# EAGLE board sniffernano2.0 (EAGLE 5.06)
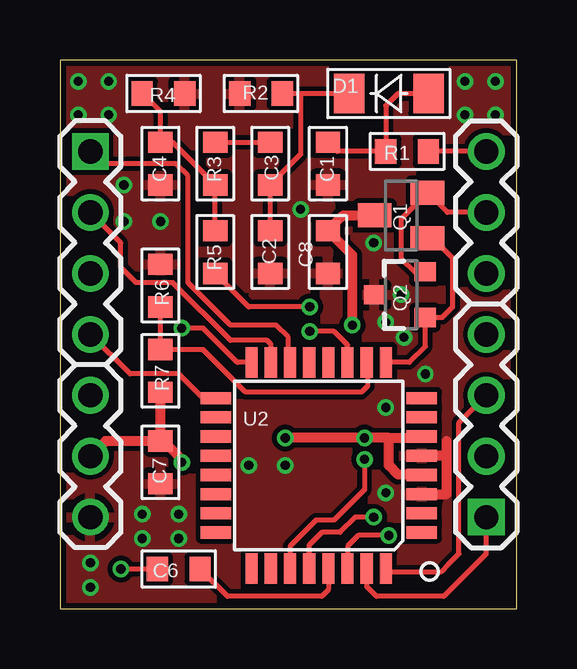
[diagram p0: board, top side]
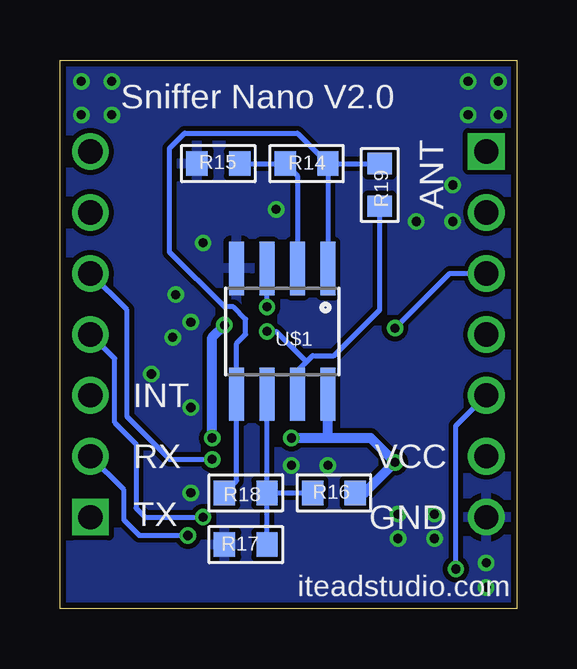
[diagram p1: board, bottom side, seen from below]

Size 19.05 x 22.86 mm. Coordinates in mm from the lower left corner, seen from the top.
Outline: 0,0 19.05,0 19.05,22.86 0,22.86 0,0
Copper layers (1*16): Top 0.035mm / dielectric 1.5mm / Bottom 0.035mm
Design rules "SeeedStudio_rule_no_angle_090911": minimum track width 6mil, minimum drill 12mil, track to track 6mil, track to pad 6mil, pad to pad 6mil, via to via 6mil, smd to smd 0mil, copper to edge 10mil, drill to drill 10mil, minimum pad ring 10mil, minimum via ring 6mil, stop-mask expansion 2mil, vias tented up to drill 100mil, thermal gap 10mil
Net classes: 0 default: width 0.003 mm, drill 0.254 mm, clearance 0.152 mm

## Footprints (pad centres in the part's own frame; a part is rotated, then mirrored left to right if it is on the bottom)
0603 = smd 0.889 x 1.016: 1 -0.889,0; 2 0.889,0
DIODE1206 = smd 1.27 x 1.651: + -1.651,0; - 1.651,0
1X04 = drill 1.016 square: 1 0,0 | drill 1.016 round: 2 2.54,0; 3 5.08,0; 4 7.62,0
1X03 = drill 1.016 round: 1 0,0; 2 2.54,0; 3 5.08,0
SOT23 = smd 1 x 1.4: 1 -0.95,-1.1; 2 0.95,-1.1; 3 0,1.1
SOT23-3 = smd 0.8 x 0.9: 1 -0.95,-1; 2 0.95,-1; 3 0,1.1
ATMEGA168-20AU = smd 1.27 x 0.508: 1 -4.293,2.8; 2 -4.293,2; 3 -4.293,1.2; 4 -4.293,0.4; 5 -4.293,-0.4; 6 -4.293,-1.2; 7 -4.293,-2; 8 -4.293,-2.8; 17 4.293,-2.8; 18 4.293,-2; 19 4.293,-1.2; 20 4.293,-0.4; 21 4.293,0.4; 22 4.293,1.2; 23 4.293,2; 24 4.293,2.8 | smd 0.508 x 1.27: 9 -2.8,-4.293; 10 -2,-4.293; 11 -1.2,-4.293; 12 -0.4,-4.293; 13 0.4,-4.293; 14 1.2,-4.293; 15 2,-4.293; 16 2.8,-4.293; 25 2.8,4.293; 26 2,4.293; 27 1.2,4.293; 28 0.4,4.293; 29 -0.4,4.293; 30 -1.2,4.293; 31 -2,4.293; 32 -2.8,4.293
SO08 = smd 0.61 x 2.21: 1 -1.905,-2.616; 2 -0.635,-2.616; 3 0.635,-2.616; 4 1.905,-2.616; 5 1.905,2.616; 6 0.635,2.616; 7 -0.635,2.616; 8 -1.905,2.616

## Placement (x,y rotation side)
C1  3.3n  [0603]  11.18,18.54 90 top
C2  102  [0603]  8.76,14.86 90 top
C3  10u  [0603]  8.76,18.54 270 top
C4  102  [0603]  4.19,18.54 90 top
C6  100n  [0603]  4.95,1.65 180 top
C7  100n  [0603]  4.19,6.1 90 top
C8  100n  [0603]  11.18,14.86 90 top
D1  4818  [DIODE1206]  13.72,21.46 180 top
JP1  [1X04]  1.27,19.05 270 top
JP2  [1X03]  1.27,8.89 270 top
JP3  [1X03]  17.78,13.97 90 top
JP4  [1X04]  17.78,3.81 90 top
Q1  S8050  [SOT23]  14.22,16.38 90 top
Q2  S8550  [SOT23-3]  14.22,13.08 90 top
R1  10R  [0603]  14.48,19.05 180 top
R2  100k  [0603]  8.38,21.46 0 top
R3  10k  [0603]  6.48,18.54 90 top
R4  100k  [0603]  4.32,21.46 180 top
R5  10k  [0603]  6.48,14.86 90 top
R6  15k  [0603]  4.19,13.46 270 top
R7  10K  [0603]  4.19,9.91 270 top
R14  15k  [0603]  8.76,18.54 0 bottom
R15  1k  [0603]  12.45,18.54 180 bottom
R16  15k  [0603]  7.62,4.83 0 bottom
R17  6.2k  [0603]  11.3,2.67 0 bottom
R18  220K  [0603]  11.3,4.83 180 bottom
R19  470K  [0603]  5.71,17.65 270 bottom
U2  ATMEGA168-20AU  [ATMEGA168-20AU]  10.79,5.97 180 top
U$1  LMV358  [SO08]  9.78,11.56 180 bottom

## Library data of the parts
C1-C4 C6-C8 = CPT_SMD; C0603: 100N
D1 R1-R7 R14-R19 = CPT_SMD
JP1-JP4 U$1 = SparkFun
Q1 Q2 = SparkFun2
U2 = IC_SMD

## Nets
A+: R5.1 U$1.3
AOUT: R14.2 R18.2 R19.1 U$1.1 U$1.5
AT1: JP3.2 Q1.2 Q2.2
AT2: JP3.3 R1.1
CS: JP1.1 U2.14
DTR: C6.2 JP2.1
GND: C1.1 C2.1 C4.1 C7.1 C8.1 JP2.3 Q2.3 R2.1 R4.1 R6.1 R15.2 R17.1 U2.3 U2.5 U$1.4
INT: JP4.3 U2.32
MISO: JP1.3 U2.16
MOSI: JP1.2 U2.15
N$2: R14.1 R15.1 U$1.2
N$3: R16.1 R17.2 R18.1 U$1.6
N$32: C1.2 D1.+ R1.2
N$33: C3.1 R3.2
N$34: C2.2 C3.2 D1.- R2.2
N$35: C4.2 R3.1 R4.2 R5.2
PC4: JP3.1 U2.27
PC5: JP4.4 U2.28
PD5: Q1.1 Q2.1 U2.9
PD6: R6.2 R7.1 U2.10
PD7: R19.2 U2.11 U$1.7
RST: C6.1 U2.29
RX: JP4.2 U2.30
SCK: JP1.4 U2.17
TX: JP4.1 U2.31
VCC: C7.2 C8.2 JP2.2 Q1.3 R7.2 R16.2 U2.4 U2.6 U$1.8

## Tracks (layer width: path | path; a pad name or v marks a point on that pad's centre or on a via)
A+  (via drill 0.38)
  Top 0.203: v10.41,12.57 7.87,12.57 R5.1
  Bottom 0.203: v10.41,12.57 U$1.3
AOUT
  Bottom 0.203: R14.2 U$1.1 | R14.2 R19.1 | R18.2 11.68,5.33 U$1.5 11.68,11.05 11.3,11.43 11.3,12.06 11.81,12.57 12.19,12.57 14.48,14.86 14.48,19.18 13.84,19.81 9.14,19.81 R14.2
AT1
  Top 0.203: Q2.2 14.8,14.03 14.22,14.61 14.22,16.23 Q1.2 16.15,16.51 JP3.2
AT2
  Top 0.203: JP3.3 R1.1
CS
  Top 0.203: U2.14 9.53,10.33 9.53,11.3 9.02,11.81 7.11,11.81 5.33,13.59 5.33,18.03 4.83,18.54 1.78,18.54 JP1.1
DTR  (via drill 0.38)
  Top 0.203: C6.2 v2.54,1.65
  Bottom 0.203: JP2.1 2.54,7.62 v2.54,1.65
GND  (via drill 0.38)
  Top 0.203: U2.5 15.11,6.35
  Top 0.406: U2.3 16.13,4.77 16.13,6.35 | 16.13,6.35 16.13,6.98 | U2.5 16.13,6.37 16.13,6.35
  other vias: 15.24,9.78 13.59,11.94 13.08,15.24 0.76,21.97 18.16,21.97 4.95,3.94 4.19,16.13 13.59,4.83 4.95,2.92 3.43,3.94 3.43,2.92 1.27,1.91 13.59,8.38 14.35,11.3 14.22,13.08 10.03,16.64 0.76,20.57 18.16,20.57 16.89,20.57 16.89,21.97 2.03,20.57 2.03,21.97 1.27,0.89 2.67,16.13 2.67,17.65 9.4,5.97 7.87,5.97
  pour Bottom (isolate 0.203): 0,22.86 19.05,22.86 19.05,0 0,0
  pour Top (isolate 0.203): 0,22.86 19.05,22.86 19.05,0 0,0
INT
  Top 0.203: 13.59,2.16 13.6,2.15 U2.32 13.75,1.52 15.88,1.52 16.19,1.84 | 16.19,1.84 16.51,2.16 | JP4.3 16.64,7.75 16.64,2.29 16.19,1.84
MISO  (via drill 0.38)
  Top 0.203: v5.08,11.68 5.97,11.68 7.39,10.26 U2.16
  Bottom 0.203: JP1.3 2.79,13.97 v5.08,11.68
MOSI
  Top 0.203: U2.15 8.79,11.02 8.64,11.18 7.11,11.18 4.7,13.59 3.17,13.59 2.54,14.22 2.54,15.24 JP1.2
N$2
  Bottom 0.203: R15.1 R14.1 9.14,18.03 U$1.2
N$3
  Bottom 0.203: R18.1 R16.1 | R18.1 U$1.6 | R17.2 R18.1
N$32
  Top 0.203: D1.+ 14.1,21.46 13.59,20.95 R1.2 11.56,19.05 C1.2
N$33
  Top 0.203: R3.2 C3.1
N$34
  Top 0.203: 10.03,21.46 R2.2 | D1.- 10.03,21.46 | C2.2 C3.2 10.03,18.92 10.03,21.46
N$35
  Top 0.203: R4.2 4.19,20.7 C4.2 4.7,19.43 R3.1 R5.2
PC4  (via drill 0.38)
  Top 0.203: U2.27 9.6,2.61 10.67,3.68 11.43,3.68 12.7,4.95 v12.7,6.22
  Bottom 0.203: v12.7,6.22 14.48,6.22 16.26,8 16.26,12.45 JP3.1
PC5  (via drill 0.38)
  Top 0.203: U2.28 10.39,2.65 10.92,3.17 11.68,3.17 12.32,3.81 v13.08,3.81
  Bottom 0.203: JP4.4 16.76,10.41 16.76,7.75 15.88,6.86 15.88,4.19 15.49,3.81 v13.08,3.81
PD5
  Top 0.203: U2.9 14.58,10.26 15.24,10.92 15.24,12.12 Q2.1 | Q2.1 15.31,12.13 | Q1.1 15.55,15.43 16.38,14.61 16.38,12.57 15.94,12.13 Q2.1
PD6
  Top 0.203: R6.2 R7.1 5.97,10.79 7.75,9.02 12.57,9.02 12.83,9.27 12.83,10.23 U2.10 12.7,10.17
PD7  (via drill 0.38)
  Top 0.203: U2.11 11.99,10.99 11.43,11.56 v10.41,11.56
  Bottom 0.203: 9.14,9.02 U$1.7 9.14,9.91 8.76,10.29 | R19.2 5.71,12.45 7.62,10.54 8.51,10.54 8.76,10.29 | v10.41,11.56 10.03,11.56 8.76,10.29
RST
  Top 0.203: C6.1 6.99,0.51 10.92,0.51 11.2,0.78 U2.29
RX  (via drill 0.38)
  Top 0.203: U2.30 11.99,2.6 12.45,3.05 v13.72,3.05
  Bottom 0.203: v13.72,3.05 15.75,3.05 16.38,3.68 16.38,4.95 JP4.2
SCK
  Top 0.203: U2.17 5.96,8.77 4.95,9.78 2.92,9.78 JP1.4
TX
  Top 0.203: 12.83,1.64 U2.31 12.79,0.92 13.21,0.51 16,0.51 17.78,2.29 JP4.1
VCC  (via drill 0.38)
  Top 0.406: C7.2 R7.2 | C7.2 1.91,6.98 JP2.2 | C7.2 4.32,6.98 5.08,6.22 v5.08,6.1 | U2.4 15.11,5.59 14.1,5.59 13.72,5.97 13.72,7.11 | Q1.3 11.81,16.38 C8.2 12.19,14.73 v12.19,11.81 | v9.4,7.11 v12.7,7.11 13.72,7.11 | 13.72,7.11 15.03,7.11 U2.6
  Bottom 0.406: 7.87,7.11 6.1,7.11 v5.08,6.1 6.35,4.83 R16.2 | v9.4,7.11 7.87,7.11 | 7.87,7.11 U$1.8 | v12.7,7.11 12.7,11.3 v12.19,11.81

## Text on the board
bPlace: Sniffer Nano V2.0 | ANT | INT | VCC | RX | GND | TX | iteadstudio.com